# Altium PCB sld_design_v1.PcbDoc
Units mil, origin at the board's own origin, x right, y up, seen from the top; angles counter-clockwise.
Board outline 6000 x 4000 mil, 2 copper layers (Top Layer, Bottom Layer); 30 components, 14 nets, 200 pads, 7 vias.
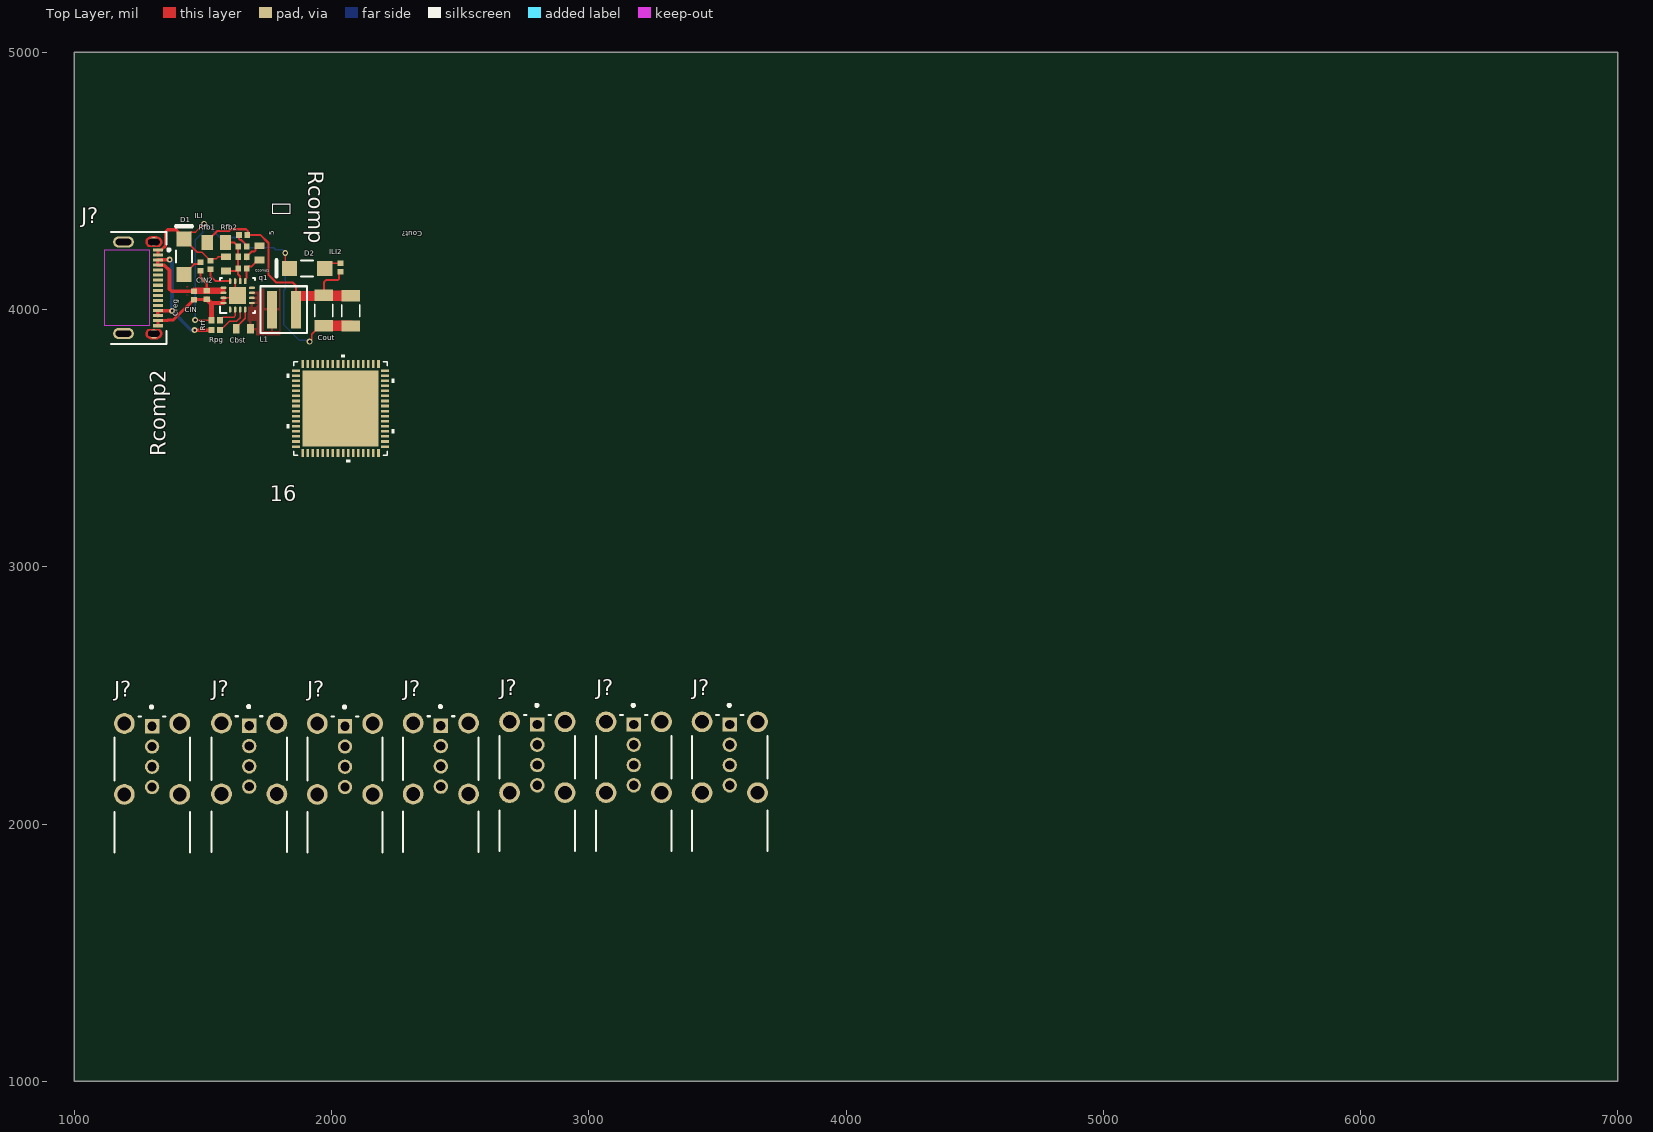
[diagram p0: Top Layer view]
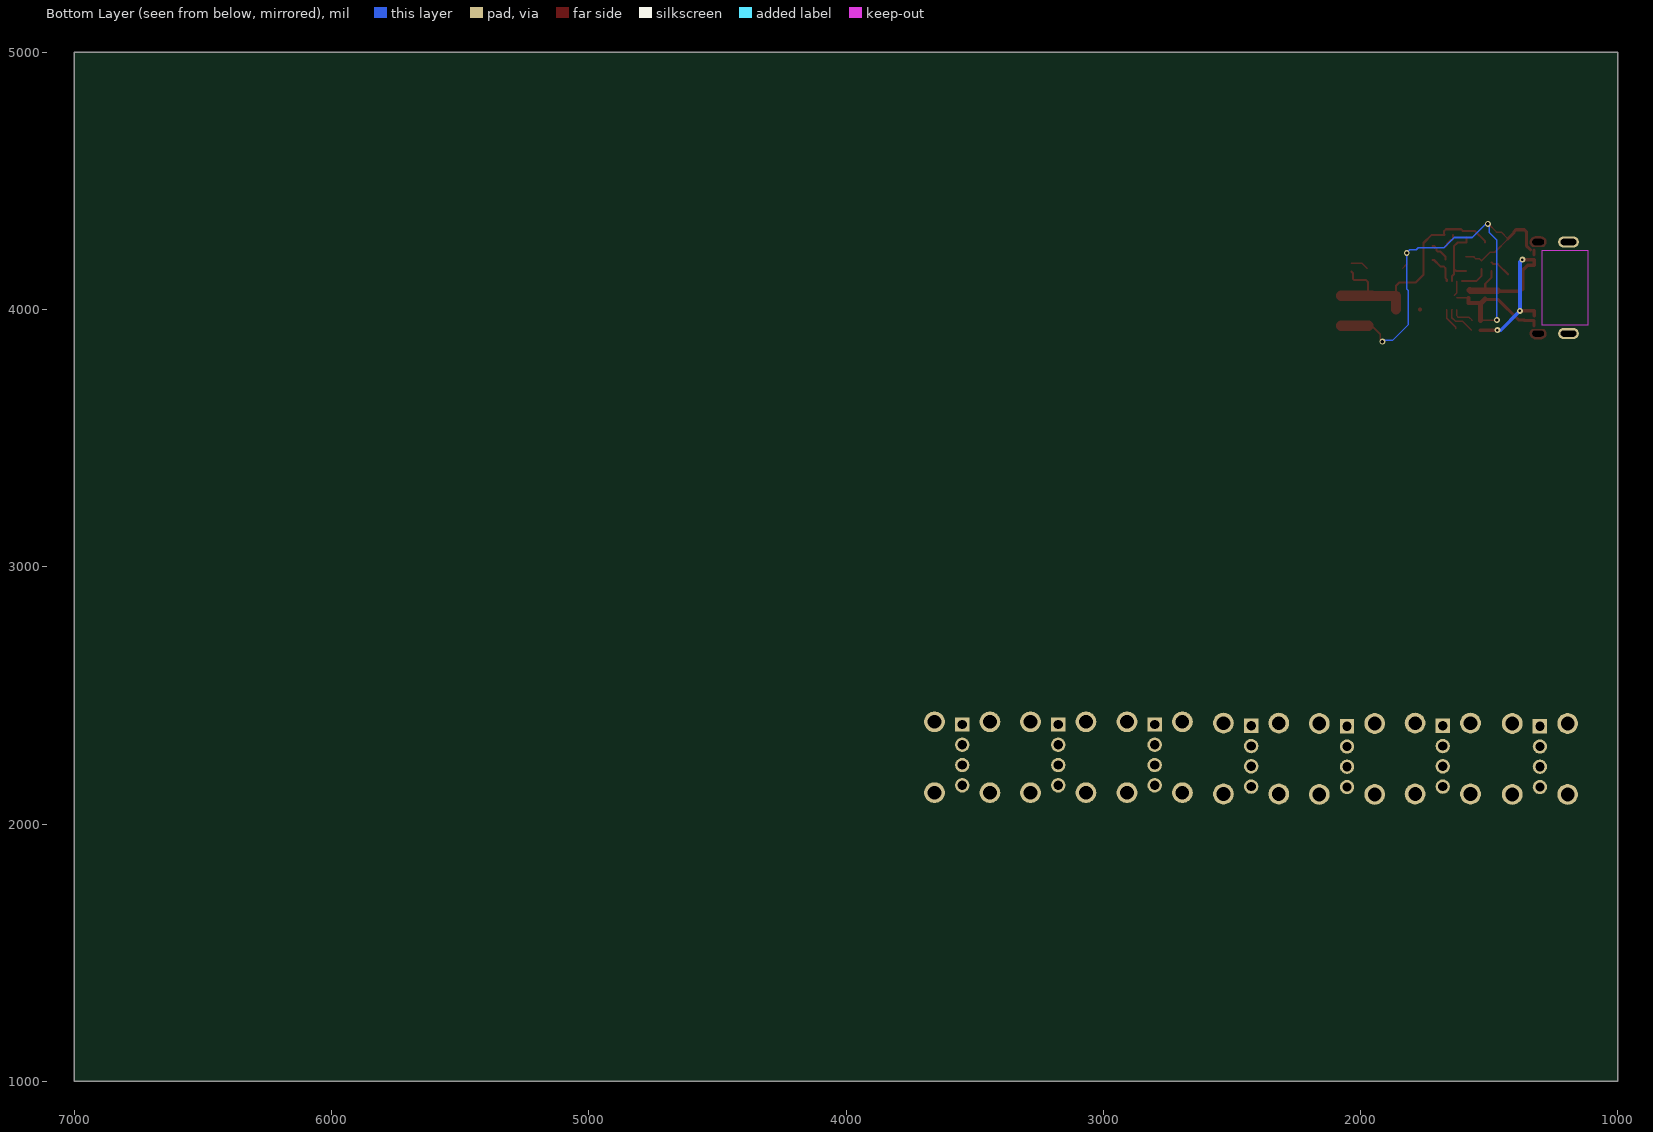
[diagram p1: Bottom Layer view, seen from below]

## Layer stack, top to bottom
Top Solder: solder mask 0.4, Solder Resist, Dk 3.5
Top Layer: signal copper 1.4
Dielectric 1: dielectric 12.6, FR-4, Dk 4.8
Bottom Layer: signal copper 1.4
Bottom Solder: solder mask 0.4, Solder Resist, Dk 3.5

## Board outline
1000,1000 7000,1000 7000,5000 1000,5000

## Design rules (kind name [scope] priority, off if disabled: settings)
AssemblyTestPointUsage [All] p1: isadvanced=TRUE
AssemblyTestpoint [All] p1: isadvanced=TRUE testpointundercomponent=TRUE minsize=40 maxsize=100 preferedsize=60 minholesize=0 maxholesize=40 preferedholesize=32 testpointgrid=1 usegrid=TRUE gridtolerance=0.01 allowsidetop=TRUE allowsidebottom=TRUE
Clearance Clearance_1 [OnMid vs OnMid] p1: gap=6 ignorepadtopadclearanceinfootprint=FALSE sourcerule=41 cellrowname=All cellrowtype=0 cellcolname=All cellcoltype=0 innerlayers=TRUE
Clearance Clearance_2 [(ExistsOnLayer('Top Layer') Or ExistsOnLayer('Bottom Layer')) vs (ExistsOnLayer('Top Layer') Or ExistsOnLayer('Bottom Layer'))] p2: gap=6 ignorepadtopadclearanceinfootprint=FALSE sourcerule=41 cellrowname=All cellrowtype=0 cellcolname=All cellcoltype=0 outerlayers=TRUE
Clearance [All] p3: gap=10 ignorepadtopadclearanceinfootprint=FALSE ismatrix=TRUE
ComponentClearance [All] p1: isadvanced=TRUE gap=10 collisioncheckmode=3 verticalgap=10 showdistances=FALSE
Creepage Creepage_1 [All] p1: checkdistance=6 applytopolygonpour=TRUE
FabricationTestPointUsage [All] p1: isadvanced=TRUE valid=0 allowmultiple=FALSE
FabricationTestpoint [All] p1: isadvanced=TRUE side=3 testpointundercomponent=TRUE minsize=40 maxsize=100 preferedsize=60 minholesize=0 maxholesize=40 preferedholesize=32 testpointgrid=1 allowsidetop=TRUE allowsidebottom=TRUE usegrid=TRUE gridtolerance=0.01
FanoutControl Fanout_BGA [IsBGA] p1: isadvanced=TRUE bgadir=Out bgaviamode=Centered fanoutstyle=Auto fanoutdirection=Alternating viagrid=1 // Fanout_BGA (Default Rule)
FanoutControl Fanout_LCC [IsLCC] p2: isadvanced=TRUE bgadir=Out bgaviamode=Centered fanoutstyle=Auto fanoutdirection=Alternating viagrid=1 // Fanout_LCC (Default Rule)
FanoutControl Fanout_SOIC [IsSOIC] p3: isadvanced=TRUE bgadir=Out bgaviamode=Centered fanoutstyle=Auto fanoutdirection=Alternating viagrid=1 // Fanout_SOIC (Default Rule)
FanoutControl Fanout_Small [(CompPinCount < 5)] p4: isadvanced=TRUE bgadir=Out bgaviamode=Centered fanoutstyle=Auto fanoutdirection=OutThenIn viagrid=1 // Fanout_Small (Default Rule)
FanoutControl Fanout_Default [All] p5: isadvanced=TRUE bgadir=Out bgaviamode=Centered fanoutstyle=Auto fanoutdirection=Alternating viagrid=1 // Fanout_Default (Default Rule)
Height [All] p1: isadvanced=TRUE minheight=0 maxheight=1000 prefheight=500
HoleSize [All] p1: isadvanced=TRUE absolutevalues=TRUE maxlimit=100 minlimit=1 maxpercent=80.000 minpercent=20.000
HoleToHoleClearance [All] p1: isadvanced=TRUE gap=6 allowstackedmicrovias=TRUE
LayerPairs [All] p1: isadvanced=TRUE enforce=TRUE
MinimumSolderMaskSliver [All] p1: isadvanced=TRUE minsoldermaskwidth=6
NetAntennae [All] p1: isadvanced=TRUE netantennaetolerance=0
PasteMaskExpansion [All] p1: isadvanced=TRUE expansion=0
PlaneClearance [All] p1: isadvanced=TRUE clearance=20
PlaneConnect [All] p1: isadvanced=TRUE planeconnectstyle=Relief reliefexpansion=20 reliefentries=4 reliefconductorwidth=10 reliefairgap=10
PolygonConnect [All] p1: connectstyle=Relief reliefconductorwidth=10 reliefentries=4 polygonreliefangle="90 Angle" airgapwidth=10
RoutingCorners [All] p1: isadvanced=TRUE cornerstyle=45-Degree minsetback=100 maxsetback=100
RoutingPriority [All] p1: isadvanced=TRUE routingpriority=0
RoutingVias RoutingViaStyle [All] p1: isadvanced=TRUE holewidth=10 width=10 viastyle="Through Hole" minholewidth=10 minwidth=6 maxholewidth=10 maxwidth=50
RoutingVias [All] p2 off: holewidth=28 width=50 viastyle="Through Hole" minholewidth=28 minwidth=50 maxholewidth=28 maxwidth=50
ShortCircuit [All] p1: isadvanced=TRUE allowed=FALSE
SilkToSilkClearance [All] p1: isadvanced=TRUE silktosilkclearance=6
SilkToSolderMaskClearance [IsPad] p1: isadvanced=TRUE minsilkscreentomaskgap=6 clearancetoexposedcopper=TRUE
SolderMaskExpansion [All] p1: isadvanced=TRUE expansion=2 istentingtop=FALSE
SupplyNets "Schematic Supply Nets_2" [InNet('GND')] p1: isadvanced=TRUE voltage=0.000
SupplyNets "Schematic Supply Nets_1" [InNet('+5')] p2: isadvanced=TRUE voltage=0.000
UnRoutedNet [All] p1: isadvanced=TRUE
UnpouredPolygon [All] p1: isadvanced=TRUE
Width MaxMinWidth_1 [All] p1: isadvanced=TRUE maxlimit=70 minlimit=6 preferedwidth=10 minimp=50.000000 maximp=50.000000 favimp=50.000000
Width [All] p2 off: maxlimit=10 minlimit=10 preferedwidth=10
4 further rules are at their usual default settings.

## Classes and differential pairs
component class sld_design_v1: 5 16  Cbst Ccomp1 CIN CIN2 Cout Cout? Creg D1 D2 ILI ILI2 L1 q1 Rcomp Rcomp2 rfb1 rfb2 Rpg Rrf

## Components (designator, comment, footprint, x,y, rotation, side; value= is the part's Value field where it differs from the comment)
5 "CL05C821JB5NNNC" 0402#1 1656.5,4290 r180 top value=Value
16 "USB2517" QFN64_9x9MC_MCH 2035,3615 r90 top
 "CL02C560JQ2ANNC" 01005 1653.5,4160 r0 top value=Value
Cbst "06033C104KAT2A" 0603 1657.5,3925 r180 top value=Value
Ccomp1 "CL10C152JB8NNNC" 0603 1720,4220 r270 top value=Value
CIN "GRM155R60J475ME8" 0402_065 1465,4055 r270 top value=Value
CIN2 "GRM155R60J475ME8" 0402_065 1515,4056.5 r270 top value=Value
Cout "GRM31CR60J107ME3" 1206_190#1 1970,3996 r270 top value=Value
Cout? "GRM31CR60J107ME3" 1206_190#2 2075,3995 r270 top value=Value
Creg "GRM155R60J475ME8" 0402_065 1530,4173.5 r90 top value=Value
D1 "HSMH-C150" AVAG-HSMX-C150_V 1426.63,4205.68 r90 top
D2 "HSMH-C150" AVAG-HSMX-C150_V 1905,4160 r180 top
ILI "CRCW0402453RFKED" 0402#2 1490,4167.04 r90 top value=Value
ILI2 "CRCW0402453RFKED" 0402#2 2035,4163.5 r90 top value=Value
J? "48204-0001" FP-48204-0001-MFG 2052.32,2033.31 r0 top
J? "48204-0001" FP-48204-0001-MFG 3175,2040 r0 top
J? "48204-0001" FP-48204-0001-MFG 1680,2035 r0 top
J? "48204-0001" FP-48204-0001-MFG 1302.32,2033.31 r0 top
J? "48204-0001" FP-48204-0001-MFG 2800,2040 r0 top
J? "48204-0001" FP-48204-0001-MFG 2425,2035 r0 top
J? "213083-0005" FP-2130830005-MFG 1185.33,4084.52 r270 top
J? "48204-0001" FP-48204-0001-MFG 3548.15,2040 r0 top
L1 "XEL4020-561MEB" XEL4020 1815,4000 r180 top value=Value
q1 "Q1" RGT0016C 1635,4055 r90 top value=Value
Rcomp "CRCW04023K01FKED" 0402#1 1653.5,4205 r0 top value=Value
Rcomp2 "CRCW0402453RFKED" 0402#1 1653.5,4245 r180 top value=Value
Rfb1 "RT0805BRD075K42L" 0805 1552.2,4260.5 r0 top value=Value (schematic designator rfb1)
Rfb2 "RC0603FR-071K2L" 0603 1590,4177.5 r90 top value=Value (schematic designator rfb2)
Rpg "CRCW040249K9FKED" 0402#1 1550,3920 r180 top value=Value
Rrf "CRCW0402174KFKED" 0402#1 1550,3958 r180 top value=Value

## Footprints (in the part's own frame and the unit in brackets; to place one, negate y for a bottom-side part, rotate by r counter-clockwise, add the part's x,y. Pads: shape width x height; smd on the part's side, far side on the other; paste and mask are expansions set on the pad)
0402#1 [mil]
  rect 22x24 smd mask+2: 1(-16.5,0) 2(16.5,0)
  body extent 0,0 10,10, height 10
0402#2 [mil]
  rect 22x24 smd: 1(-16.5,0) 2(16.5,0)
  body extent 0,0 10,10, height 10
0402_065 [mil]
  rect 22x24 smd mask+2: 1(-16.5,0) 2(16.5,0)
  body extent 0,0 10,10, height 10
0603 [mil]
  rect 26x38 smd mask+2: 1(-27.5,0) 2(27.5,0)
  body extent 0,0 10,10, height 10
0805 [mil]
  rect 44x57 smd mask+2: 1(-35.5,0) 2(35.5,0)
  body extent 0,0 10,10, height 10
01005 [mil]
  rect 22x24 smd mask+2: 1(-16.5,0) 2(16.5,0)
  body extent 0,0 10,10, height 10
1206_190#1 [mil]
  rect 44x71 smd mask+2: 1(-59,0) 2(59,0)
  silkscreen extent -24,-36 24,36, body extent 0,0 10,10, height 10
1206_190#2 [mil]
  rect 44x71 smd: 1(-59,0) 2(59,0)
  silkscreen extent -24,-36 24,36, body extent 0,0 10,10, height 10
AVAG-HSMX-C150_V [mm] "SMD, 2-Leads, Body 3.2x1.6mm"
  rect 1.5x1.5 smd mask+0.051: 1(-1.75,0) 2(1.75,0)
  silkscreen extent -0.6,-0.8 3,0.8, body extent -1.6,-0.8 1.6,0.8, height 1.1
FP-48204-0001-MFG [mm]
  rect 1.42x1.42 hole 0.92 paste-2539.97 mask+0: 1(0,8.805)
  round 1.42 hole 0.92 paste-2539.97 mask+0: 2(0,6.805) 3(0,4.805) 4(0,2.805)
  round 2.05 hole 1.35 paste-2539.97 mask+0: 5(-2.735,9.075) 6(2.735,9.075) 7(-2.735,2.075) 8(2.735,2.075)
  silkscreen extent -3.72,-3.67 3.72,10.83, body extent -3.86,-9.85 3.86,10.2, height 0.25
FP-2130830005-MFG [mm]
  round 0.9 smd paste-1000 mask+0: 1(-4.57,3.15) 2(4.57,3.15)
  round 0 hole 1.15 slot 0.6 at 0 deg paste-1000 mask+0: 1(-4.52,3.15) 2(4.52,3.15)
  rrect100% 1.1x2.05 hole 1.55 slot 0.6 at 0 deg paste-2539.97 mask+0: 3(-4.52,0.15) 4(4.52,0.15)
  rect 0.3x1 smd paste+0 mask+0: A1(-3.75,3.55) A4(-2.75,3.55) A5(-1.75,3.55) A6(-0.75,3.55) A7(0.75,3.55) A8(1.75,3.55) A9(2.75,3.55) A12(3.75,3.55) B1(3.25,3.55) B4(2.25,3.55) B5(1.25,3.55) B6(0.25,3.55) B7(-0.25,3.55) B8(-1.25,3.55) B9(-2.25,3.55) B12(-3.25,3.55)
  Top Layer region: 5.07,3.425 5.001,3.691 4.812,3.891 4.549,3.974 4.28,3.919 4.07,3.741 4.07,3.741 4.07,2.559 4.28,2.381 4.549,2.326 4.812,2.409 5.001,2.609 5.07,2.875 5.07,2.875
  Top Layer region: -5.07,3.425 -5.001,3.691 -4.812,3.891 -4.549,3.974 -4.28,3.919 -4.07,3.741 -4.07,3.741 -4.07,2.559 -4.28,2.381 -4.549,2.326 -4.812,2.409 -5.001,2.609 -5.07,2.875 -5.07,2.875
  Keep-Out Layer region: -3.7,-1.745 3.7,-1.745 3.7,2.755 -3.7,2.755
  silkscreen extent -5.53,-1.07 5.53,4.75, body extent -5.33,-4.18 5.33,4.18, height 0.25
QFN64_9x9MC_MCH [mil]
  rect 32x10 smd paste+0 mask+0: 1(-173,147.64) 2(-173,127.95) 3(-173,108.27) 4(-173,88.58) 5(-173,68.9) 6(-173,49.21) 7(-173,29.53) 8(-173,9.84) 9(-173,-9.84) 10(-173,-29.53) 11(-173,-49.21) 12(-173,-68.9) 13(-173,-88.58) 14(-173,-108.27) 15(-173,-127.95) 16(-173,-147.64) 33(173,-147.64) 34(173,-127.95) 35(173,-108.27) 36(173,-88.58) 37(173,-68.9) 38(173,-49.21) 39(173,-29.53) 40(173,-9.84) 41(173,9.84) 42(173,29.53) 43(173,49.21) 44(173,68.9) 45(173,88.58) 46(173,108.27) 47(173,127.95) 48(173,147.64)
  rect 10x32 smd paste+0 mask+0: 17(-147.64,-173) 18(-127.95,-173) 19(-108.27,-173) 20(-88.58,-173) 21(-68.9,-173) 22(-49.21,-173) 23(-29.53,-173) 24(-9.84,-173) 25(9.84,-173) 26(29.53,-173) 27(49.21,-173) 28(68.9,-173) 29(88.58,-173) 30(108.27,-173) 31(127.95,-173) 32(147.64,-173) 49(147.64,173) 50(127.95,173) 51(108.27,173) 52(88.58,173) 53(68.9,173) 54(49.21,173) 55(29.53,173) 56(9.84,173) 57(-9.84,173) 58(-29.53,173) 59(-49.21,173) 60(-68.9,173) 61(-88.58,173) 62(-108.27,173) 63(-127.95,173) 64(-147.64,173)
  rect 295x295 smd paste-147.5 mask+0: 65(0,0)
  silkscreen extent -209,-209 209,209, body extent -177,-177 177,177, height 39
RGT0016C [mm]
  oval 0.6x0.24 smd paste-0.102 mask+0: 1(-1.4,0.75) 2(-1.4,0.25) 3(-1.4,-0.25) 4(-1.4,-0.75) 9(1.4,-0.75) 10(1.4,-0.25) 11(1.4,0.25) 12(1.4,0.75)
  oval 0.24x0.6 smd paste-0.102 mask+0: 5(-0.75,-1.4) 6(-0.25,-1.4) 7(0.25,-1.4) 8(0.75,-1.4) 13(0.75,1.4) 14(0.25,1.4) 15(-0.25,1.4) 16(-0.75,1.4)
  rect 1.7x1.7 smd paste-0.85 mask+0: 17(0,0)
  silkscreen extent -1.72,-1.73 1.72,1.73, body extent 0,0 0.25,0.25, height 0.25
XEL4020 [mm]
  rect 0.98x3.7 smd paste+0 mask+0.051: 1(-1.185,0) 2(1.185,0)
  silkscreen extent -2.3,-2.3 2.3,2.3, body extent 0,0 0.25,0.25, height 0.25

## Part data
5  Ccomp1: "No Description Available", Manufacturer_Name="Samsung Electro-Mechanics", Copyright="Copyright (C) 2018 Accelerated Designs. All rights reserved", RefDes=RefDes, Type=TYPE, Vendor="Samsung Electro-Mechanics"
  5: Manufacturer_Part_Number=CL05C821JB5NNNC
  : Manufacturer_Part_Number=CL02C560JQ2ANNC
  Ccomp1: Manufacturer_Part_Number=CL10C152JB8NNNC
16: "The 7-Port Hub is a low power, OEM configurable, MTT / (multi transaction translator) hub controller IC with 7 / downstream ports for embedded USB solutions. The 7- / port hub is fully compliant with the USB 2.0 Specifica- / tion and will attach to an upstream port as a Full-Speed / Hub or as a Full-/Hi-Speed Hub. The 7-Port Hub sup- / ports Low-Speed, Full-Speed, and Hi-Speed (if operat- / ing as a Hi-Speed Hub) downstream devices on all of / the enabled downstream ports."
Cbst: "No Description Available", Manufacturer_Name=AVX, Copyright="Copyright (C) 2018 Accelerated Designs. All rights reserved", Manufacturer_Part_Number=06033C104KAT2A, RefDes=RefDes, Type=TYPE, Vendor=AVX
CIN CIN2 Creg: "No Description Available", Manufacturer_Name=MuRata, Manufacturer_Part_Number=GRM155R60J475ME87D, Copyright="Copyright (C) 2018 Accelerated Designs. All rights reserved", RefDes=RefDes, Type=TYPE, Vendor=MuRata
Cout Cout?: "No Description Available", Manufacturer_Name=MuRata, Manufacturer_Part_Number=GRM31CR60J107ME39L, Copyright="Copyright (C) 2018 Accelerated Designs. All rights reserved", RefDes=RefDes, Type=TYPE, Vendor=MuRata
D1 D2: library part CMP-2000-06426-1, "LED Uni-Color Red, 65 mW, 25 mA, -40 to 85 degC, 2-Pin SMD, RoHS, Tape and Reel", Emitting Color=Red, Forward Current=25mA, Forward Voltage=2.6V, Manufacturer=Avago, Operating Temp Range=-40Cto85C, Operating Temperature Classification=Industrial, Package Description="2-Pin Surface Mount Device, Body 3.2 x 1.6 mm", Package Reference=HSMX-C150, Package Type=ChipLed, Power Dissipation=78W, Reverse Voltage=5V, Test Current (It)=20mA, Chip Material=GaAlAs, Datasheet URL=http://media.digikey.com/pdf/Data%20Sheets/Avago%20PDFs/HSMz-Czzz.pdf, Datasheet Version=03/2012, DELETED=Compliant, Dominant Wave Length=639nm, High Brightness=No, Lens Dimensions=2x1.6x0.6mm, Lens Type=ColorlessDiffused, Lum Intensity=17mcd, Luminous Intensity=17mcd, Main Category=ChipLED, Manufacturer URL=http://www.avagotech.com/, Mounting=SurfaceMount, Mounting Technology=SurfaceMount, Number of  Elements=1, Packaging=TapeandReel, Peak Wavelength=660nm, Pin Count=2, Product Depth (mm)=1.6mm, Product Height (mm)=1.1mm, Product Length (mm)=3.2mm, Rad Hardened=No, Shape Type=Rectangular, Type=Uni-Color, Viewing Angle=170deg
ILI ILI2 Rcomp Rcomp2 Rrf: "No Description Available", Manufacturer_Name=Vishay-Dale, Copyright="Copyright (C) 2018 Accelerated Designs. All rights reserved", RefDes=RefDes, Type=TYPE, Vendor=Vishay-Dale
  ILI ILI2 Rcomp2: Manufacturer_Part_Number=CRCW0402453RFKED
  Rcomp: Manufacturer_Part_Number=CRCW04023K01FKED
  Rrf: Manufacturer_Part_Number=CRCW0402174KFKED
J? J? J? J? J? J? J?: library part CMP-0411-00001-3, "CONN RCPT USB2.0 TYPEA 4POS R/A", Color=Black, Current Rating=1.5A, Flammability Rating="UL94 V-0", Insulation Resistance=1GR, Max Operating Temperature=85°C, Max Voltage Rating (AC)=30V, Max Voltage Rating (DC)=3.03kV, Min Operating Temperature=-55°C, Package Quantity=60, Connector Type=USB, Contact Material=Tin, Contact Plating=Bronze, Depth=19.25mm, Features=Shielded, Gender=Female, Housing Material=Polyester, Length=7.2mm, Number of Circuits=4, Number of Contacts=4, Number of Ports=1, Number of Rows=3, Number of Terminals/Pins=4, Orientation="Right Angle", Packaging=Tray, Pitch=2mm, Radiation Hardening=No, Series=48204, Termination=Solder, Voltage Rating=30V, Voltage Rating (AC)=30V, Weight=0.09524oz
J?: library part CMP-04767-000030-2, "CONN RCP USB2.0 TYP C 24P SMD RA", Current Rating=5A, Max Operating Temperature=85°C, Min Operating Temperature=-40°C, Voltage Rating=30V, Contact Material="Gold, Nickel", Country of Origin=CN, Gender=Receptacle, NexarPartId=114105384, Number of Contacts=16, Schedule B="8536695050, 8536695050", USB Standard="USB 2.0"
L1: "560nH", Manufacturer_Name=Coilcraft, Copyright="Copyright (C) 2018 Accelerated Designs. All rights reserved", Manufacturer_Part_Number=XEL4020-561MEB, RefDes=RefDes, Type=TYPE, Vendor=Coilcraft
q1: library part TPS53316RGTR, "No Description Available", Manufacturer_Name="Texas Instruments", Copyright="Copyright (C) 2018 Accelerated Designs. All rights reserved", Manufacturer_Part_Number=TPS53316RGTR, RefDes=RefDes, Type=TYPE, Vendor="Texas Instruments"
Rfb1 Rfb2: "No Description Available", Manufacturer_Name=Yageo, Copyright="Copyright (C) 2018 Accelerated Designs. All rights reserved", RefDes=RefDes, Type=TYPE, Vendor="Yageo America"
  Rfb1: Manufacturer_Part_Number=RT0805BRD075K42L
  Rfb2: Manufacturer_Part_Number=RC0603FR-071K2L
Rpg: "No Description Available", Manufacturer_Name=Vishay-Dale, Power_W=0.063, Copyright="Copyright (C) 2018 Accelerated Designs. All rights reserved", Manufacturer_Part_Number=CRCW040249K9FKED, PartNumber=CRCW040249K9FKED, RefDes=RefDes, Res_ohm=49900, Type=TYPE

## Via types
v1: diameter 23, hole 13, Top Layer to Bottom Layer, 4 vias
v2: diameter 23, hole 10, Top Layer to Bottom Layer, 3 vias

## Nets (pads, with @x,y where several pads share a name; then routed paths per layer and width w, separated by ;. In a path a pad name is that pad's centre, name@x,y a point inside that pad or via, vN(x,y) a via of type N, cw(c..) or ccw(c..) an arc to the next point about the centre after c; other vN are vias at no path point)
+5: CIN2.1 CIN.1 ILI.1 J?.A4 J?.A9 J?.B4 J?.B9 q1.13 q1.14 Rpg.2 | length 950.8
  Top Layer w8: ILI.1 1490,4125 1515,4100 CIN2.1 ; Rpg.2@1533.5,3919 Rpg.2
  Top Layer w14: J?.A9 J?.B4 1379.06,3995.94 v2(1380,3995) ; v2(1370.57,4194.03) 1369.95,4193.41 1325.71,4193.41 J?.A4 J?.B9 1325.87,4172.33 1350.16,4172.33 1370,4152.49 1370,4080 1378.5,4071.5 CIN.1 ; v2(1467.63,3919.99) Rpg.2
  Top Layer w25: CIN.1@1465.75,4072.25 CIN2.1@1514.25,4072.25 ; CIN2.1 1573,4073 1575,4075
  Bottom Layer w14: v2(1370.57,4194.03) 1380,4184.6 v2(1380,3995) 1455,3920 v2(1467.63,3919.99)
COMP: .2 Ccomp1.2 q1.9 | length 116.6
  Top Layer w8: q1.9@1664.8,4110.4 q1.9 1664.53,4117.6 1670,4123.07 .2 1670,4161 1677,4168 1689.5,4168 1714,4192.5 Ccomp1.2
FB: .1 q1.10 Rcomp2.2 Rcomp.1 Rfb1.2 Rfb2.1 | length 265.8
  Top Layer w8: Rfb1.2 1622.5,4260.5 1637,4246 Rcomp2.2 Rcomp.1 .1 ; Rfb1.2@1587.81,4260.39 Rfb1.2@1587.81,4280 ; Rfb2.1 1628,4150 1637,4159 .1 ; q1.10 1644.57,4110.4 1644.57,4128.43 1637,4136 .1
GND: CIN2.2 CIN.2 Cout.2 Cout?.2 Creg.2 D1.2 D2.2 J?.A1 J?.A12 J?.B1 J?.B12 q1.11 q1.15 q1.16 q1.17 Rfb2.2 Rrf.2 | length 2514.4
  Top Layer w6: v1(1469.55,3959.11) 1532.39,3959.11 Rrf.2 ; v1(1504.75,4333.09) 1503.09,4333.09 1471.1,4301.1 1453.16,4301.1 D1.2 1478.2,4223 1496,4223 1529,4190 Creg.2 1538,4198 1553,4198 1560,4205 Rfb2.2 ; q1.15 q1.17@1625.16,4045.16 ; q1.11 1625.16,4064.84 q1.17 ; v1(1820,4220) 1820,4176.1 D2.2 ; v1(1915,3875) 1923.42,3883.42 1923.42,3903.92 Cout.2@1956.5,3937
  Top Layer w12: J?.A12 J?.B1 1361.57,3956.57 1365,3960 1385.5,3960 1464,4038.5 CIN.2 1465.75,4039.25 1514.25,4039.25 CIN2.2 ; J?.B12 J?.A1 ; J?.A1@1338.78,4232.26 1355,4248.48 1355,4302.97 1362.03,4310 1396.07,4310 1403.1,4302.97 1403.1,4298.1 D1.2
  Top Layer w14: q1.16 q1.15
  Top Layer w15: CIN2.2 1516,4040 1530.53,4025.47 q1.16
  Top Layer w20: CIN2.2@1516,4040 1533.5,4022.5 Rrf.2
  Top Layer w40: Cout.2 1970.5,3936.5 2074.5,3936.5 Cout?.2 Cout?.2@2061.5,3936
  Bottom Layer w6: v1(1469.55,3959.11) 1469.55,3994.55 1470,3995 1470,4270 1499.09,4299.09 1499.09,4327.42 v1(1504.75,4333.09) 1511.91,4333.09 1565,4280 1635,4280 1675,4240 1775,4240 1782.83,4232.17 1807.97,4232.17 1820,4220.14 1820,4080.2 1815,4075.2 1815,3940 1875,3880 1911.49,3880 1915,3876.49 v1(1915,3875)
Net5_2: 5.2 Rcomp2.1 | length 60.7
  Top Layer w8: 5.2 1640,4274.69 1644.69,4270 1650,4270 1660,4260 1660.31,4260 1663,4257.31 1663,4252 Rcomp2.1
NetCcomp1_1: Ccomp1.1 Rcomp.2 | length 94.2
  Top Layer w8: Rcomp.2@1670,4195 Rcomp.2 1670,4206 1689,4225 1700,4225 1705,4230 1705,4238.5 1714,4247.5 Ccomp1.1 Ccomp1.1@1712.17,4239.67
NetCreg_1: Creg.1 q1.12 | length 110.7
  Top Layer w8: Creg.1 1530,4130 1549.88,4110.12 q1.12
NetD1_1: D1.1 ILI.2 | length 82.7
  Top Layer w8: D1.1 1466.39,4176.54 1483,4176.54 ILI.2
NetD2_1: D2.1 ILI2.2 | length 69.4
  Top Layer w6: D2.1 1993.9,4180 ILI2.2
PGD: q1.3 Rpg.1 | length 127.9
  Top Layer w6: Rpg.1@1570,3920 1570,3921 1604,3955 1631.49,3955 1644.84,3968.36 q1.3 q1.3@1644.18,3999.22
RF: q1.2 Rrf.1 | length 91.1
  Top Layer w6: Rrf.1 1566.5,3959 1574.5,3967 1575.5,3967 1578.5,3970 1620,3970 1625.16,3975.16 q1.2
SW: Cbst.1 L1.2 q1.5 q1.6 q1.7 | length 1.2
  Top Layer w15: L1.2 L1.2@1769.17,3999.17
VBST: Cbst.2 q1.4 | length 89.6
  Top Layer w6: Cbst.2 1630,3931 1665,3966 1665,3999.41 q1.4
Vout: 5.1 Cout.1 Cout?.1 ILI2.1 L1.1 Rfb1.1 | length 997.5
  Top Layer w8: Rfb1.1 1516.7,4267 1554.7,4305 1601.42,4305 1608.42,4312 1668,4312 1675,4305 1675,4292 5.1 1723.64,4290 1755,4258.64 1755,4135 1785,4105 1850,4105 1861.65,4093.35 L1.1@1861.65,4052.13 ; Cout.1 1970,4105 1980,4115 2025,4115 2029.69,4119.69 2029.69,4141.69 ILI2.1
  Top Layer w40: L1.1 1861.65,4052.13 1862.36,4052.83 1954.33,4052.83 1955.5,4054 Cout?.1
pads on no net: 16.1 16.2 16.3 16.4 16.5 16.6 16.7 16.8 16.9 16.10 16.11 16.12 16.13 16.14 16.15 16.16 16.17 16.18 16.19 16.20 16.21 16.22 16.23 16.24 16.25 16.26 16.27 16.28 16.29 16.30 16.31 16.32 16.33 16.34 16.35 16.36 16.37 16.38 16.39 16.40 16.41 16.42 16.43 16.44 16.45 16.46 16.47 16.48 16.49 16.50 16.51 16.52 16.53 16.54 16.55 16.56 16.57 16.58 16.59 16.60 16.61 16.62 16.63 16.64 16.65 J?.1 J?.2 J?.3 J?.4 J?.5 J?.6 J?.7 J?.8 J?.A5 J?.A6 J?.A7 J?.A8 J?.B5 J?.B6 J?.B7 J?.B8 q1.1 q1.8

## Polygon pours and split planes (outlines as drawn)
+5 on Top Layer "sw_plane" (solid, pour order 0): 1435,4090 1435,4055 1590,4055 1595,4060 1595,4090
SW on Top Layer "sw_plane" (solid, pour order 1): 1675,4070 1675,3955 1665,3945 1665,3900 1800,3900 1800,4080 1725,4080 1715,4070 1680,4070

## Text inside footprints (layer, text, board x,y; h text height)
16: Mechanical 13 "*" at 1902.52,3445.5 h50 r90